# Altium PCB D_FEE PID.PcbDoc
Units mm, origin at the board's own origin, x right, y up, seen from the top; angles counter-clockwise.
Board outline 74.57 x 41.05 mm, 2 copper layers (Top Layer, Bottom Layer), stack 1.58 mm thick; 117 components, 79 nets, 453 pads, 0 vias.
Unrouted connection lines stored in the file: 259.
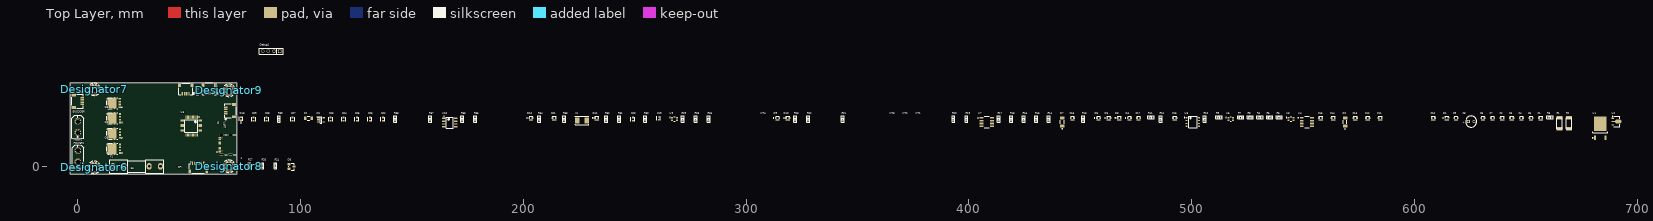
[diagram p0: Top Layer view]
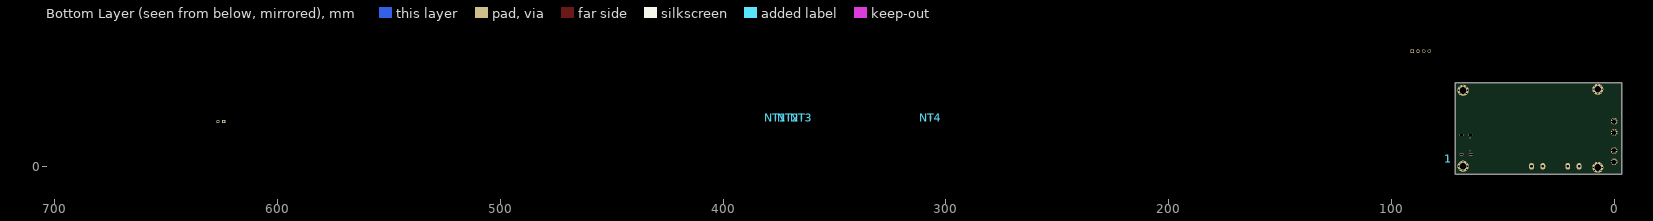
[diagram p1: Bottom Layer view, seen from below]

## Layer stack, top to bottom
Top Solder: solder mask 0.01, Solder Resist, Dk 3.5
Top Layer: signal copper 0.035
Dielectric 1: dielectric 1.51, FR-4, Dk 4.8
Bottom Layer: signal copper 0.035
Bottom Solder: solder mask 0.01, Solder Resist, Dk 3.5

## Board outline
-3.353,-3.48 71.222,-3.48 71.222,37.567 -3.353,37.567

## Design rules (kind name [scope] priority, off if disabled: settings)
Clearance [All] p1: gap=0 ignorepadtopadclearanceinfootprint=FALSE
PolygonConnect [All] p1: connectstyle=Relief reliefconductorwidth=0.254 reliefentries=4 polygonreliefangle="90 Angle" airgapwidth=0.254
RoutingVias [All] p1: holewidth=0.2 width=0.5 viastyle="Through Hole" minholewidth=0.2 minwidth=0.5 maxholewidth=0.2 maxwidth=0.5
SolderMaskExpansion [All] p1: expansion=0.102 istentingtop=FALSE
Width [All] p1: maxlimit=2 minlimit=0.1 preferedwidth=0.3 minimp=50.000000 maximp=50.000000 favimp=50.000000
30 further rules are at their usual default settings.

## Components (designator, comment, footprint, x,y, rotation, side; value= is the part's Value field where it differs from the comment)
1 "Node_B" Node_B 74.346,3.404 r90 top
C1 "1uF" FP-CC0603-DA-MFG 656.666,21.692 r0 top value="10 nF"
C2 "1uF" FP-CC0603-DA-MFG 639.394,21.692 r0 top value="10 nF"
C3 "1uF" FP-CC0603-DA-MFG 643.712,21.692 r0 top value="10 nF"
C4 "100nF" FP-CC0603-DA-MFG 648.03,21.692 r0 top value="10 nF"
C5 "10uF" FP-CC0603-DA-MFG 652.348,21.692 r0 top value="10 nF"
C6 "1uF" FP-CC0603-DA-MFG 630.758,21.692 r0 top value="10 nF"
C7 "10uF" FP-CC0603-DA-MFG 635.076,21.692 r0 top value="10 nF"
C8 "470uF/50V" CA-ALU-5L 625.475,20.092 r0 top value=104
C9 "10uF" FP-CC0603-DA-MFG 618.668,21.692 r0 top value="10 nF"
C10 "100nF" FP-CC0603-DA-MFG 608.482,21.692 r0 top value="10 nF"
C11 "1uF" FP-CC0603-DA-MFG 584.606,21.692 r0 top value="10 nF"
C12 "10uF" FP-CC0603-DA-MFG 579.018,21.692 r0 top value="10 nF"
C13 "1uF" FP-CC0603-DA-MFG 573.43,21.692 r0 top value="10 nF"
C14 "100nF" FP-CC0603-DA-MFG 563.499,21.692 r0 top value="10 nF"
C15 "100nF" FP-CC0603-DA-MFG 557.911,21.692 r0 top value="10 nF"
C16 "1uF" FP-CC0603-DA-MFG 492.43,21.692 r0 top value="10 nF"
C17 "10uF" FP-CC0603-DA-MFG 476.148,21.692 r0 top value="10 nF"
C18 "1uF" FP-CC0603-DA-MFG 446.481,21.692 r0 top value="10 nF"
C19 "100nF" FP-CL10-0_1-MFG 260.756,21.565 r90 top
C20 "10pF" FP-CC0603-DA-MFG 249.123,21.184 r90 top value="10 nF"
C21 "10pF" FP-CC0603-DA-MFG 213.792,21.692 r0 top value="10 nF"
C22 "22nF" FP-CC0603-DA-MFG 136.881,21.184 r90 top value="10 nF"
C23 "100nF" FP-CC0603-DA-MFG 113.513,21.184 r90 top value="10 nF"
C24 "100nF" FP-CC0603-DA-MFG 119.355,21.184 r90 top value="10 nF"
C25 "100nF" FP-CC0603-DA-MFG 125.197,21.184 r90 top value="10 nF"
C26 "100nF" FP-CC0603-DA-MFG 131.039,21.184 r90 top value="10 nF"
C27 "100nF" FP-CC0603-DA-MFG 96.418,21.184 r90 top value="10 nF"
C28 "1uF" FP-CC0603-DA-MFG 84.734,21.184 r90 top value="10 nF"
C29 "1uF" FP-CC0603-DA-MFG 78.892,21.184 r90 top value="10 nF"
CAN "JST SR 4PIN" "JST SR 4PIN" 58.987,34.814 r0 top
D1 "LTST-C191KRKT" FP-LTST-C191KRKT-MFG 614.578,21.768 r0 top
D2 "1N4148" FP-DO-213AA-MFG 568.858,19.914 r90 top
D3 "LTST-C191TBKT" FP-LTST-C191TBKT-MFG 467.436,21.743 r0 top
D4 "LTST-C191TBKT" FP-LTST-C191TBKT-MFG 472.059,21.743 r0 top
D5 "LTST-C191TBKT" FP-LTST-C191TBKT-MFG 458.216,21.743 r0 top
D6 "LTST-C191TBKT" FP-LTST-C191TBKT-MFG 462.813,21.743 r0 top
D7 "1N4148" FP-DO-213AA-MFG 441.909,19.914 r90 top
D8 "PGB102ST23WR" FP-PGB1-ST23-MFG 95.885,-0.127 r0 top value=0.12pF
D9 "LTST-C191TBKT" FP-LTST-C191TBKT-MFG 314.071,21.743 r0 top
D10 "LTST-C191TBKT" FP-LTST-C191TBKT-MFG 318.694,21.743 r0 top
D11 "LTST-C191TBKT" FP-LTST-C191TBKT-MFG 232.893,21.743 r0 top
D12 "LTST-C191TBKT" FP-LTST-C191TBKT-MFG 203.403,21.743 r0 top
D13 "LTST-C191KRKT" FP-LTST-C191KRKT-MFG 73.228,21.285 r90 top
Debug1 "JP4" JP4-C1T 90.576,51.664 r180 top
Designator6 "Comment" PAD_2.0 7.341,-0.457 r0 top
Designator7 "Comment" PAD_2.0 7.341,34.595 r0 top
Designator8 "Comment" PAD_2.0 67.793,0.025 r0 top
Designator9 "Comment" PAD_2.0 67.804,34.123 r0 top
ENCODER "JST SR 4PIN" "JST SR 4PIN" -0.117,29.278 r90 top
F1 "F1A" Fuse1 26.416,0 r0 top value=Fuse
F2 "FUSE 1206" FP-MF-NSMF110-2-MFG 103.53,21.539 r0 top value=0.06-0.2Ω
IC1 "RT9193-33GB" SOT94P279X130-5N 109.144,20.828 r0 top
J6 "USB4105-GF-A" GCT_USB4105-GF-A 68.529,9.728 r90 top
Motor1 "XT30UPB-M" XT30UPB-M -0.043,17.722 r90 top
NT1 "Node_B" Node_B 376.225,21.844 r90 top
NT2 "Node_B" Node_B 370.383,21.844 r90 top
NT3 "Node_B" Node_B 364.541,21.844 r90 top
NT4 "Node_B" Node_B 306.553,21.844 r90 top
POWER1 "XT30UPB-M" XT30UPB-M 0.007,4.537 r90 top
PULSE "JST SR 4PIN" "JST SR 4PIN" 48.384,34.764 r0 top
Q1 "NTMFS3D5N08XT1G" NTMFS5C460NLT1G 18.874,5.945 r90 top
Q2 "NTMFS3D5N08XT1G" NTMFS5C460NLT1G 18.874,12.795 r90 top
Q3 "NTMFS3D5N08XT1G" NTMFS5C460NLT1G 18.874,19.644 r90 top
Q4 "NTMFS3D5N08XT1G" NTMFS5C460NLT1G 18.86,26.494 r90 top
R1 "4R7" RES-SMD-2010 665.302,19.304 r90 top
R2 "4R7" RES-SMD-2010 669.493,19.304 r90 top
R3 "330" RES-SMD-0603 660.832,21.971 r0 top
R4 "5.1K" RES-SMD-0603 530.682,21.971 r0 top
R5 "5.1K" RES-SMD-0603 535,21.971 r0 top
R6 "4R7" RES-SMD-0603 539.344,21.971 r0 top
R7 "5.1K" RES-SMD-0603 522.021,21.971 r0 top
R8 "5.1K" RES-SMD-0603 526.339,21.971 r0 top
R9 "4R7" RES-SMD-0603 512.318,21.971 r0 top
R10 "5.1K" RES-SMD-0603 505.943,21.209 r90 top
R11 "5.1K" RES-SMD-0603 481.711,21.971 r0 top
R12 "5.1K" RES-SMD-0603 486.054,21.209 r90 top
R13 "330R" RES-SMD-0603 451.282,21.209 r90 top
R14 "330R" RES-SMD-0603 435.788,21.209 r90 top
R15 "5.1K" RES-SMD-0603 424.586,21.209 r90 top
R16 "5.1K" RES-SMD-0603 430.174,21.209 r90 top
R17 "5.1K" RES-SMD-0603 413.385,21.209 r90 top
R18 "5.1K" RES-SMD-0603 418.973,21.209 r90 top
R19 "4R7" RES-SMD-0603 398.907,21.209 r90 top
R20 "4R7" RES-SMD-0603 393.065,21.209 r90 top
R21 "330R" RES-SMD-0603 343.357,21.209 r90 top
R22 "330R" RES-SMD-0603 327.863,21.209 r90 top
R23 "5.1K" RES-SMD-0603 321.996,21.209 r90 top
R24 "5.1K" RES-SMD-0603 88.722,0.229 r90 top
R25 "220K" RES-SMD-0603 283.235,21.209 r90 top
R26 "27R" RES-SMD-0603 82.88,0.229 r90 top
R27 "27R" RES-SMD-0603 77.013,0.229 r90 top
R28 "220K" RES-SMD-0603 277.368,21.209 r90 top
R29 "5.1K" RES-SMD-0603 271.526,21.209 r90 top
R30 "4R7" RES-SMD-0603 254.711,21.209 r90 top
R31 "5.1K" RES-SMD-0603 243.002,21.209 r90 top
R32 "5.1K" RES-SMD-0603 237.16,21.209 r90 top
R33 "4R7" RES-SMD-0603 218.364,21.209 r90 top
R34 "1.5K" RES-SMD-0603 207.162,21.209 r90 top
R35 "220K" RES-SMD-0603 178.384,21.209 r90 top
R36 "220K" RES-SMD-0603 172.542,21.209 r90 top
R37 "120R" RES-SMD-0603 158.217,21.209 r90 top
R38 "1K" RES-SMD-0603 142.443,21.209 r90 top
R39 "330R" RES-SMD-0603 90.322,21.209 r90 top
SPI "JST SR 6PIN" "JST SR 6PIN" 53.984,1.462 r0 top
U1 "L78M15CDT-TR" TO-252_N 683.412,17.069 r90 top
U2 "L78L05ABUTR" SOT-89_L 690.702,20.092 r0 top
U3 "SN74LVC2G14DCKR" FP-DCK0006A-MFG 544.576,21.209 r0 top
U4 "IR2184SPBF" FP-PG-DSO-8-MFG 551.764,19.863 r0 top
U5 "SN74LVC2G14DCKR" FP-DCK0006A-MFG 517.55,21.209 r0 top
U6 "HCPL-0631-500E" FP-HCPL-0631-500E-IPC_C 500.558,19.914 r0 top
U7 "IR2184SPBF" FP-PG-DSO-8-MFG 408,19.863 r0 top
U8 "STM32F103C8T6" STM-LQFP48_L 50.934,18.073 r270 top
U9 "SN74LVC2G17DCKR" FP-DCK0006A-MFG 267.818,21.209 r0 top
U10 "MCP2551-I/SN" MCHP-SN8_V 166.98,19.634 r0 top
UART "JST SR 4PIN" "JST SR 4PIN" 68.443,25.027 r270 top
X1 "8Mhz" FP-ABM7-MFG 226.314,20.6 r0 top

## Footprints (in the part's own frame and the unit in brackets; to place one, negate y for a bottom-side part, rotate by r counter-clockwise, add the part's x,y. Pads: shape width x height; smd on the part's side, far side on the other; paste and mask are expansions set on the pad)
CA-ALU-5L [mm] "Polarized capacitors, Aluminum Electrolytic Capacitors, 2-Leads, Body 5x11x2x0.5"
  rect 1.5x1.5 hole 0.8: 1(-1.27,0)
  round 1.5 hole 0.8: 2(1.27,0)
  silkscreen extent -2.5,-2.5 2.5,2.5, body extent -2.54,-2.54 2.54,2.54, height 13.9
FP-ABM7-MFG [mm]
  rect 1.9x2.6 smd paste+0 mask+0: 1(-2.15,0) 2(2.15,0)
  silkscreen extent -3.1,-1.85 3.1,1.85, body extent -3.2,-1.95 3.2,1.95, height 0.25
FP-CC0603-DA-MFG [mm]
  rect 0.8x0.9 smd paste+0 mask+0: 1(-0.75,0) 2(0.75,0)
  silkscreen extent -0.85,-0.85 0.85,0.85, body extent -1.35,-0.75 1.35,0.75, height 0.25
FP-CL10-0_1-MFG [mm]
  rect 0.625x0.825 smd paste+0 mask+0: 1(-0.575,0) 2(0.575,0)
  silkscreen extent -0.8,-0.79 0.8,0.79, body extent -0.99,-0.55 0.99,0.55, height 0.25
FP-DCK0006A-MFG [mm]
  rect 0.9x0.4 smd paste-1000 mask+0: 1(-1.1,0.65) 2(-1.1,0) 3(-1.1,-0.65) 4(1.1,-0.65) 5(1.1,0) 6(1.1,0.65)
  silkscreen extent -2.22,-1.07 0.27,1.07, body extent -1.65,-1.33 1.65,1.33, height 0.25
FP-DO-213AA-MFG [mm]
  rect 1.4x2.03 smd paste+0 mask+0: 1(-1.84,0) 2(1.84,0)
  silkscreen extent -3.2,-0.85 0.76,0.85, body extent -2.64,-1.11 2.64,1.11, height 0.25
FP-HCPL-0631-500E-IPC_C [mm]
  rect 0.914x0.518 smd paste+0 mask+0: 1(-2.795,1.905)
  rrect100% 0.914x0.518 smd paste+0 mask+0: 2(-2.795,0.635) 3(-2.795,-0.635) 4(-2.795,-1.905) 5(2.795,-1.905) 6(2.795,-0.635) 7(2.795,0.635) 8(2.795,1.905)
  silkscreen extent -3.88,-2.54 1.84,2.54, body extent -3.35,-2.64 3.35,2.64, height 0.25
FP-LTST-C191KRKT-MFG [mm]
  rect 0.8x0.8 smd paste+0 mask+0: 1(-0.75,0) 2(0.75,0)
  silkscreen extent -1.86,-0.78 0.86,0.78, body extent -1.25,-0.55 1.25,0.55, height 0.25
FP-LTST-C191TBKT-MFG [mm]
  rect 0.8x0.8 smd paste+0 mask+0: 1(-0.75,0) 2(0.75,0)
  silkscreen extent -1.87,-0.8 0.85,0.8, body extent -1.25,-0.55 1.25,0.55, height 0.25
FP-MF-NSMF110-2-MFG [mm]
  rect 1x1.6 smd paste+0 mask+0: 1(-1.5,0) 2(1.5,0)
  silkscreen extent -0.63,-0.9 0.63,0.9, body extent -2.1,-1 2.1,1, height 0.25
FP-PG-DSO-8-MFG [mm]
  rect 1.78x0.72 smd paste+0 mask+0: 1(-2.34,1.905) 2(-2.34,0.635) 3(-2.34,-0.635) 4(-2.34,-1.905) 5(2.34,-1.905) 6(2.34,-0.635) 7(2.34,0.635) 8(2.34,1.905)
  silkscreen extent -4.05,-2.5 1.07,2.5, body extent -3.33,-2.68 3.33,2.68, height 0.25
FP-PGB1-ST23-MFG [mil]
  rect 50x40 smd paste+0 mask+0: 1(-45,40) 2(-45,-40) 3(45,0)
  silkscreen extent -48,-63 48,63, body extent -74,-67 74,67, height 10
Fuse1 [mm]
  oval 2.2x3 hole 1.2: 1(-10.684,0) 1(-5.604,0) 2(5.579,0) 2(10.659,0)
  silkscreen extent -12.12,-3.05 12.09,3.05, body extent -10.84,-2.95 10.87,2.95, height 9.75
GCT_USB4105-GF-A [mm]
  rect 0.6x1.15 smd mask+0.05: A1_B12(-3.2,4.755) A4_B9(-2.4,4.755) B1_A12(3.2,4.755) B4_A9(2.4,4.755)
  rect 0.3x1.15 smd mask+0.05: A5(-1.25,4.755) A6(-0.25,4.755) A7(0.25,4.755) A8(1.25,4.755) B5(1.75,4.755) B6(0.75,4.755) B7(-0.75,4.755) B8(-1.75,4.755)
  oval 1x2.1 hole 0.6 slot 1.7 at 90 deg: SH1(-4.32,4.18) SH2(4.32,4.18)
  oval 1x1.8 hole 0.6 slot 1.4 at 90 deg: SH3(-4.32,0) SH4(4.32,0)
  round 0.65 hole 0.65 unplated: ""(-2.89,3.68) ""(2.89,3.68)
  silkscreen extent -4.47,-2.6 4.47,6.1, body extent -4.47,-2.6 4.47,5.11, height 3.31
JP4-C1T [mm] "4 row, straight, gold plating"
  rect 1.52x1.52 hole 1.02: 1(0,0)
  round 1.52 hole 1.02: 2(2.54,0) 3(5.08,0) 4(7.62,0)
  silkscreen extent -1.52,-1.27 9.14,1.27, body extent -1.52,-1.25 9.14,1.25, height 8.51
"JST SR 4PIN" [mil] "CONN_SM04B-SRSS-TB_JST"
  rect 26x61 smd paste+0 mask+0: 1(59.06,-82.62) 2(19.68,-82.62) 3(-19.68,-82.62) 4(-59.06,-82.62)
  rect 51x75 smd paste-37.5 mask-37.5: 5(-110.24,69.94) 6(110.24,69.94)
  silkscreen extent -123,-102 163,102, body extent -118,-91 118,104, height 116
"JST SR 6PIN" [mm]
  rect 0.6x1.55 smd: 1(-2.5,0) 2(-1.5,0) 3(-0.5,0) 4(0.5,0) 5(1.5,0) 6(2.5,0)
  rect 1.2x1.8 smd: S1(-3.8,-3.875) S2(3.8,-3.875)
  silkscreen extent -4,-4.57 4,0.6, body extent -4,-4.63 4,0.32, height 2.95
MCHP-SN8_V [mm] "SOIC, 8-Leads, Body 4.9x3.9mm, Pitch 1.27mm"
  rect 1.55x0.6 smd: 1(-2.7,1.905) 2(-2.7,0.635) 3(-2.7,-0.635) 4(-2.7,-1.905) 5(2.7,-1.905) 6(2.7,-0.635) 7(2.7,0.635) 8(2.7,1.905)
  silkscreen extent -2.82,-2.45 1.53,2.88, body extent -3,-2.45 3,2.45, height 1.75
Node_B [mm]
  rect 1.454x0.3 smd far side mask+0.065: 1(0,0.102) 2(0,-0.508)
NTMFS5C460NLT1G [mm]
  rect 0.75x1 smd: 1(0,0.021) 2(1.27,0.021) 3(2.54,0.021) 4(3.81,0.021)
  rect 0.75x0.475 smd: 5(3.81,5.779) 6(0,5.779)
  rect 4.56x2.73 smd: 7(1.905,4.179)
  rect 5.55x0.91 smd: 8(1.905,2.364)
  rect 4.56x0.43 smd: 9(1.905,1.699)
  silkscreen extent -0.55,-1 4.36,5.85, body extent -0.68,-0.28 4.47,5.87, height 1.01
PAD_2.0 [mm]
  round 0.5 hole 0.5: ""(-2.032,0) ""(-1.437,-1.437) ""(-1.437,1.437) ""(0,-2.032) ""(0,2.032) ""(1.437,-1.437) ""(1.437,1.437) ""(2.032,0)
  round 5 hole 3.1: ""(0,0)
  silkscreen extent -2.81,-2.81 2.81,2.81
RES-SMD-0603 [mm]
  rect 0.6x0.9 smd: 1(-0.889,0) 2(0.927,0)
  silkscreen extent -1.4,-0.64 1.4,0.64, body extent -0.8,-0.4 0.8,0.4, height 0.43
RES-SMD-2010 [mm] "Chip Capacitor, Body 3.2x2.5mm, IPC Medium Density"
  rect 1.5x2.7 smd: 1(-2.5,0.127) 2(2.5,0.127)
  silkscreen extent -2.54,-1.14 2.5,1.38, body extent -2.5,-1.12 2.5,1.38, height 0.6
SOT94P279X130-5N [mm]
  rect 1.25x0.65 smd: 1(-1.25,0.94) 2(-1.25,0) 3(-1.25,-0.94) 4(1.25,-0.94) 5(1.25,0.94)
  silkscreen extent -1.88,-1.45 0.28,1.51, body extent -1.4,-1.45 1.4,1.45, height 1.3
SOT-89_L [mm] "SOT89, 3-Leads, Body 4.5x2.4 mm, Pitch 1.5mm, Lead Span 4.1mm, IPC High Density"
  rect 1.2x0.5 smd: 1(-1.7,1.5) 3(-1.7,-1.5)
  rect 1.6x0.5 smd: 2(-1.5,0)
  oct 3x1.8 smd: 2(0.8,0)
  silkscreen extent -1.97,-2.3 1.4,2.42, body extent -1.2,-2.3 1.4,2.3, height 1.6
STM-LQFP48_L [mm] "QFP, 48-Leads, Body 7x7mm, Pitch 0.5mm, IPC High Density"
  oval 1.55x0.25 smd: 1(-4.025,2.75) 2(-4.025,2.25) 3(-4.025,1.75) 4(-4.025,1.25) 5(-4.025,0.75) 6(-4.025,0.25) 7(-4.025,-0.25) 8(-4.025,-0.75) 9(-4.025,-1.25) 10(-4.025,-1.75) 11(-4.025,-2.25) 12(-4.025,-2.75) 25(4.025,-2.75) 26(4.025,-2.25) 27(4.025,-1.75) 28(4.025,-1.25) 29(4.025,-0.75) 30(4.025,-0.25) 31(4.025,0.25) 32(4.025,0.75) 33(4.025,1.25) 34(4.025,1.75) 35(4.025,2.25) 36(4.025,2.75)
  oval 0.25x1.55 smd: 13(-2.75,-4.025) 14(-2.25,-4.025) 15(-1.75,-4.025) 16(-1.25,-4.025) 17(-0.75,-4.025) 18(-0.25,-4.025) 19(0.25,-4.025) 20(0.75,-4.025) 21(1.25,-4.025) 22(1.75,-4.025) 23(2.25,-4.025) 24(2.75,-4.025) 37(2.75,4.025) 38(2.25,4.025) 39(1.75,4.025) 40(1.25,4.025) 41(0.75,4.025) 42(0.25,4.025) 43(-0.25,4.025) 44(-0.75,4.025) 45(-1.25,4.025) 46(-1.75,4.025) 47(-2.25,4.025) 48(-2.75,4.025)
  silkscreen extent -4.15,-2.85 2.85,3.55, body extent -3.5,-3.5 3.5,3.5, height 1.6
TO-252_N [mm] "D-PAK, 4-Leads, Body 6.1x6.5mm, Pitch 2.28mm, Lead Span 9.7mm, IPC Medium Density"
  rect 2.1x0.95 smd: 1(-4.25,2.28) 3(-4.25,-2.28)
  rect 6.5x5.5 smd: 4(2.05,0)
  silkscreen extent -4.37,-3.3 -1.6,3.43, body extent -2,-3.3 4.2,3.3, height 2.4
XT30UPB-M [mil]
  round 118.11 hole 70.87: P$1(-98.43,0) P$2(98.43,0)
  round 10 hole 10: ""(-144.68,0) ""(-131.14,-32.71) ""(-131.14,32.71) ""(-98.43,-46.26) ""(-98.43,46.26) ""(-65.71,-32.71) ""(-65.71,32.71) ""(-52.17,0) ""(52.17,0.98) ""(65.02,-32.01) ""(66.41,33.41) ""(97.44,-46.26) ""(99.41,46.26) ""(130.44,-33.41) ""(131.83,32.01) ""(144.69,-0.98)
  silkscreen extent -201,-102 201,102, body extent -201,-102 201,102, height 421

## Part data
1 NT1 NT2 NT3 NT4: "Node"
C1 C2 C3 C4 C5 C6 C7 C9 C10 C11 C12 C13 C14 C15 C16 C17 C18 C20 C21 C22 C23 C24 C25 C26 C27 C28 C29: library part CMP-2100-03600-2, "CAP CER 10000PF 50V X7R 0603", Capacitance="10 nF", Manufacturer=YAGEO, Manufacturer Part Number=CC0603KRX7R9BB103, Package=CC0603-DA, Temperature="-55°C to +125°C", Temperature Characteristic=X7R, Temperature Coefficient=15%, Temperature Range High=+125°C, Temperature Range Low=-55°C, Tolerance=0.1, Voltage="50 V", Automotive=No, Category=Cap, ComponentLink2Description=Datasheet, ComponentLink2URL=http://www.yageo.com/documents/recent/UPY-GPHC_X7R_6.3V-to-50V_18.pdf, Device Class L1="Passive Components", Device Class L2=Capacitors, Device Class L3="Ceramic Capacitors", Digikey Description="CAP CER 10000PF 50V X7R 0603", Footprint Url=http://www.yageo.com/exep/pages/download/literatures/UPY-C_GEN_24.pdf, Height=0.9mm, Lead Free=Yes, Material=Ceramic, Mouser Description="Multilayer Ceramic Capacitor, CC Series, 0.01 - F, - 10%, X7R, 50 V, 0603 [1608 Metric]", Octopart=https://octopart.com/cc0603krx7r9bb103-yageo-192938, RoHS=TRUE, Voltage Rating="50 V"
C8: library part CN-ALU-DIP, "Capacitor (Semiconductor SIM Model)", LatestRevisionDate=17-Jul-2002, LatestRevisionNote="Re-released for DXP Platform.", PackageReference=C1206, Publisher="Altium Limited"
C19: library part CMP-13271-000011-1, "CAP CER 0.1UF 50V X7R 0603", Manufacturer="Samsung Electro-Mechanics America, Inc", Manufacturer Part Number=CL10B104JB8NNNC, Package=CL10-0.1, Temperature="-55°C to +125°C", Temperature Characteristic=X7R, Temperature Coefficient=15%, Temperature Range High=+125°C, Temperature Range Low=-55°C, Tolerance=5%, Voltage Rating=50V, Automotive=No, Capacitance=100nF, Category=Cap, ComponentLink2Description=Datasheet, ComponentLink2URL=http://www.samsungsem.com/kr/support/product-search/mlcc/__icsFiles/afieldfile/2019/06/18/CL10B104JB8NNNC-19.pdf, Device Class L1="Passive Components", Device Class L2=Capacitors, Device Class L3="Ceramic Capacitors", Digikey Description="CAP CER 0.1UF 50V X7R 0603", Height=0.9mm, Ipc Land Pattern Name=CAPC16080X80, Lead Free=Yes, Material=Ceramic, Octopart=https://octopart.com/cl10b104jb8nnnc-samsung-9302151, RoHS=TRUE
CAN ENCODER PULSE UART: "SM04B-SRSS-TB", Mfr_Name=JST, RefDes=RefDes, Type=Type
D1 D13: library part CMP-2000-05199-2, Case Code (Imperial)=0603, Case Code (Metric)=1608, Color=Red, Current=2A, Forward Current=20mA, Forward Voltage=2V, Lens Color=Colorless, Max Operating Temperature=85°C, Min Operating Temperature=-55°C, Power Dissipation=75mW, Reverse Voltage=5V, Case/Package=0603, Depth=800µm, Dominant Wavelength=631nm, Height=550µm, Illumination Color=Red, Lead Free="Lead Free", Length=1.6mm, Lens Style=Clear, Lens Transparency=Clear, Luminous Intensity=54mcd, Mount="Surface Mount", NexarPartId=549908, Number of Elements=1, Number of LEDs=1, Number of Pins=2, Packaging="Tape and Reel", Power Rating=75mW, Radiation Hardening=No, RoHS=Compliant, Schedule B="8541402000, 8541402000", Test Current=20mA, Viewing Angle=130°, Voltage=2V, Wavelength=639nm, Width=800µm
D2 D7: library part CMP-06359-000012-1, "DIODE GEN PURP 75V 200MA DO213AA"
D3 D4 D5 D6 D9 D10 D11 D12: library part CMP-22017-000008-1, "LED BLUE CLEAR CHIP SMD", Case Code (Imperial)=0603, Case Code (Metric)=1608, Color=Blue, Forward Current=20mA, Forward Voltage=3.8V, Lens Color=Colorless, Max Operating Temperature=80°C, Max Power Dissipation=75mW, Min Operating Temperature=-20°C, Package Quantity=1, Power Dissipation=76mW, Reverse Voltage=5V, Case/Package=0603, Depth=1.6mm, Dominant Wavelength=475nm, Height=0.55mm, Illumination Color=Blue, Lead Free="Lead Free", Length=0.8mm, Lens Style=Diffused, Lens Transparency=Clear, Luminous Intensity=180mcd, Mount="Surface Mount", Number of Elements=1, Number of LEDs=1, Number of Pins=2, Packaging="Tape and Reel", Radiation Hardening=No, Test Current=20mA, Viewing Angle=130°, Wavelength=468nm, Width=0.8mm
D8: library part CMP-08607-000007-1, "TVS DIODE 24V 150V SOT23-3", Capacitance=0.12pF, Clamping Voltage=150V, Manufacturer="Littelfuse Inc", Package=PGB1-ST23, Temperature="-65°C to +125°C", Temperature Range High=+125°C, Temperature Range Low=-65°C, Automotive=No, Category=Diode, ComponentLink2Description=Datasheet, ComponentLink2URL=https://www.littelfuse.com/~/media/electronics/datasheets/pulseguard_esd_suppressors/littelfuse_pulseguard_pgb1_datasheet.pdf.pdf, Device Class L1="Circuit Protection", Device Class L2="TVS Diodes", Device Class L3=unset, Digikey Description="TVS DIODE 24V 150V SOT23-3", Direction=Bidirectional, Height=0.79mm, Lead Free=Yes, Manufacturer Part Number=PGB102ST23WR, Mouser Description="ESD Suppressors PulseGuard ESD SOT23 24VDC PGB102ST23WR", Number of Channels=2, Octopart=https://octopart.com/pgb102st23wr-littelfuse-347719, RoHS=TRUE
Debug1: "WR-PHD 2.54 mm Angled Socket Header", Manufacturer="W¨¹rth Elektronik eiSos GmbH", partNo=613004143121, ComponentLink1 Description=Manufacturer, ComponentLink1URL=http://www.we-online.com, ComponentLink2 Description=Datasheet, ComponentLink2URL=http://katalog.we-online.de/em/datasheet/6130xx143121.pdf, Created by="Karrer Zheng", Created Date="29 March 2013", NoPins=04
F1: library part Fuse, "Fuse", Designed by=VanDungEvn
F2: library part CMP-07400-000012-1, "PTC RESET FUSE 6V 1.1A 1206", Ambient Temperature Range High=+85°C, Ambient Temperature Range Low=-40°C, Current Rating=100A, Hold Current=1.1A, Manufacturer=Bourns, Manufacturer Part Number=MF-NSMF110-2, Resistance=0.06-0.2Ω, Temperature="-40°C to +85°C", Trip Current=2.2A, Voltage Rating=6V, Automotive=Yes, Automotive Grade="Grade 3", Category=Fuse, ComponentLink2Description=Datasheet, ComponentLink2URL=https://www.bourns.com/docs/Product-Datasheets/mfnsmf.pdf, Device Class L1="Circuit Protection", Device Class L2="PTC Resettable Fuses", Device Class L3=unset, Digikey Description="PTC RESET FUSE 6V 1.1A 1206", Height=0.7mm, Lead Free=Yes, Mouser Description="Resettable Fuses - PPTC 1.1A 6V 0.06ohm", Octopart=https://octopart.com/mf-nsmf110-2-bourns-41795, Package=MF-NSMF110-2, RoHS=TRUE, Temperature Range High=+85°C, Temperature Range Low=-40°C, Trip Time=0.1s
IC1: "Integrated Circuit", Manufacturer_Name=RICHTEK, Mouser Part Number=835-RT9193-33GB, Datasheet Link=http://www.richtek.com/assets/product_file/RT9193/DS9193-17.pdf, Height=1.295mm, Manufacturer_Part_Number=RT9193-33GB, Mouser Price/Stock=https://www.mouser.co.uk/ProductDetail/Richtek/RT9193-33GB?qs=amGC7iS6iy8ybRcZ9Wn2ww%3D%3D
J6: Package=None, Availability=Unavailable, MF="{'manufacturer': u'GCT'}", MP=USB4105-GF-A, Price=None
Motor1 POWER1: "Socket; DC supply; XT30; male; PIN: 2; on PCBs; THT; yellow; 15A; 500V", Package=None, Availability="Not in stock", Check_prices=https://www.snapeda.com/parts/XT30UPB-M/AMASS/view-part/?ref=eda, MF=amass, MP=XT30UPB-M, Price=None, SnapEDA_Link=https://www.snapeda.com/parts/XT30UPB-M/AMASS/view-part/?ref=snap
Q1 Q2 Q3 Q4: "MOSFET (N-Channel)", Manufacturer_Name=onsemi, Datasheet Link=https://www.onsemi.com/download/data-sheet/pdf/ntmfs3d5n08x-d.pdf, Height=1.1mm, Manufacturer_Part_Number=NTMFS3D5N08XT1G
R1 R2 R3 R4 R5 R6 R7 R8 R9 R10 R11 R12 R13 R14 R15 R16 R17 R18 R19 R20 R21 R22 R23 R24 R25 R26 R27 R28 R29 R30 R31 R32 R33 R34 R35 R36 R37 R38 R39: library part Res-SMD, "Resistor", Manufacturer="Generic Components", Class=Passive, Published=08/06/2000, Publisher="Altium Hobart Technology Centre"
SPI: "Connector Header Surface Mount, Right Angle 6 position 0.039 _1.00mm_SM06B-SRSS-TB(LF)(SN)", Package=None, Digi-Key_Part_Number=455-1806-1-ND, Digi-Key_Purchase_URL=https://www.digikey.com/product-detail/en/jst-sales-america-inc/SM06B-SRSS-TB_LF__SN_/455-1806-1-ND/926877?utm_source=snapeda&utm_medium=aggregator&utm_campaign=symbol, MF="JST Sales", MP=SM06B-SRSS-TB_LF__SN_, SnapEDA_Link=https://www.snapeda.com/parts/SM06B-SRSS-TB%28LF%29%28SN%29/JST%20Sales%20America%20Inc./view-part/554386/?ref=snap
U1: library part CMP-0244-00203-1, "Positive Voltage Regulator, 15V, 3-Pin DPAK, Tape and Reel", ComponentLink1Description="Manufacturer URL", ComponentLink1URL=http://www.st.com, ComponentLink2Description=Datasheet, ComponentLink2URL=http://www.st.com/internet/com/TECHNICAL_RESOURCES/TECHNICAL_LITERATURE/DATASHEET/CD00000447.pdf, DatasheetVersion=1/11/2010, PackageDescription="3-Pin Transistor Outline Package 2.28 mm Pitch, 9.7 mm Lead Span (DPAK)", PackageReference=TO-252, PackageVersion=2011
U2: library part CMP-0244-00406-1, "Positive Voltage Regulator, 5V, 4-Pin SOT-89, Tape and Reel", ComponentLink1Description="Manufacturer URL", ComponentLink1URL=http://www.st.com, ComponentLink2Description=Datasheet, ComponentLink2URL=http://www.st.com/internet/com/TECHNICAL_RESOURCES/TECHNICAL_LITERATURE/DATASHEET/CD00000446.pdf, DatasheetVersion=1/02/2011, PackageDescription="3-Pin SOT-89 Package 1.5 mm Pitch, 4.1 mm Lead Span", PackageReference=SOT-89, PackageVersion=2011
U3 U5: library part CMP-0859-00454-5, "IC INVERTER SCHMITT 2CH SC70-6", Case/Package=SC, High Level Output Current=-32mA, Low Level Output Current=32mA, Max Operating Temperature=125°C, Max Supply Voltage=5.5V, Min Operating Temperature=-40°C, Min Supply Voltage=1.65V, Package Quantity=3000, Quiescent Current=10uA, Contact Plating=Gold, Lead Free="Lead Free", Logic Function=Inverting, Max Output Current=32mA, Mount="Surface Mount", Number of Bits=2, Number of Circuits=2, Number of Elements=2, Number of Gates=2, Number of Inputs=1, Number of Pins=6, Output Current=32mA, Packaging="Tape and Reel", Propagation Delay=9.5ns, Radiation Hardening=No, REACH SVHC="No SVHC", RoHS Compliant=Yes, Termination=SMD/SMT, Turn-On Delay Time=9.5ns, Weight=8.8E-05oz
U4 U7: library part CMP-32851-000025-1, "IC GATE DRVR HALF-BRIDGE 8SOIC", Ambient Temperature Range High=+125°C, Ambient Temperature Range Low=-40°C, Manufacturer=Infineon, Max Junction Temp=+150°C, Max Power Dissipation=0.625W, Max Supply Voltage=20V, Min Supply Voltage=10V, Nominal Supply Current=60-1000uA, Package=PG-DSO-8, Temperature="to +150°C", Automotive=No, Category=IC, ComponentLink2Description=Datasheet, ComponentLink2URL=https://www.infineon.com/dgdl/ir2184.pdf?fileId=5546d462533600a4015355c955e616d4, Device Class L1="Integrated Circuits (ICs)", Device Class L2="Power Management ICs", Device Class L3="Gate Drivers", Digikey Description="IC GATE DRVR HALF-BRIDGE 8SOIC", Fall Time=20ns, Footprint Url=https://www.infineon.com/dgdl/Infineon-po-8leadsoic-P-v01_00-EN.pdf?fileId=5546d462580663ef0158068b4ad80177, Height=1.75mm, Ipc Land Pattern Name=SOIC127P600X155-8, Lead Free=Yes, Manufacturer Part Number=IR2184SPBF, Number Of Drivers=2, Number Of Outputs=1, Octopart=https://octopart.com/ir2184spbf-infineon-65872954, Rise Time=40ns, RoHS=TRUE, Standoff Height=0.1mm, Temperature Range High=+150°C, Turn Off Delay Time=270ns, Turn On Delay Time=680ns
U6: library part CMP-18400-000027-1, "OPTOISO 3.75KV 2CH OPEN COLL 8SO", Case/Package=SOIC, Forward Current=15mA, Forward Voltage=1.5V, Isolation Voltage=3.75kV, Max Collector Current=50mA, Max Operating Temperature=85°C, Max Output Voltage=7V, Max Power Dissipation=60mW, Min Operating Temperature=-40°C, Package Quantity=1, Reverse Breakdown Voltage=5V, Contact Plating=Tin, Data Rate=10Mbps, Direction=Unidirectional, Fall Time=10ns, Input Current=15mA, Input Type=DC, Isolation Voltage-Max=3.75kV, Lead Free="Lead Free", Mount="Surface Mount", Number of Channels=2, Number of Elements=2, Number of Pins=8, Output Current=50mA, Output Current per Channel=50mA, Output Voltage=7V, Packaging="Tape and Reel", Power Dissipation=60mW, Propagation Delay=75ns, Radiation Hardening=No, REACH SVHC="No SVHC", Reverse Voltage (DC)=5V, Rise Time=24ns, RoHS Compliant=Yes, Series=-, Turn-On Delay Time=75ns, Voltage=5V
U8: library part CMP-0237-00215-3, "ARM Cortex-M3 32-bit MCU, 64 KB Flash, 20 KB Internal RAM, 37 I/Os, 48-pin LQFP, -40 to 85 degC, Tray", I/Os (High Current)=37, Operating Frequency(F) (Processor speed) (MHz)=72, Supply Voltage(Vcc) min (V)=2, A/D Converter="2x12-bit (10 Channel)", ComponentLink1Description="Manufacturer URL", ComponentLink1URL=http://www.st.com/web/en/home.html, ComponentLink2Description=Datasheet, ComponentLink2URL=http://www.st.com/st-web-ui/static/active/en/resource/technical/document/datasheet/CD00161566.pdf, ComponentLink3Description="Package Specification", ComponentLink3URL=http://www.st.com/st-web-ui/static/active/en/resource/technical/document/datasheet/DM00058181.pdf, Core="ARM Cortex-M3", DatasheetVersion="Rev. 16", FLASH Size (Prog) (kB)=64, Internal RAM Size (kB)=20, Mounting Technology="Surface Mount", PackageDescription="48-Pin Low Profile Quad Flat Package, 7 x 7 mm Body, 0.5 mm Pitch", PackageReference=LQFP48, PackageVersion="Rev. 6, 06/2013", Packing=Tray, PartNumber=STM32F103C8T6
U9: library part CMP-0859-00517-5, "IC BUF NON-INVERT 5.5V SC70-6", Case/Package=SC, High Level Output Current=-32mA, Low Level Output Current=32mA, Max Operating Temperature=125°C, Max Supply Voltage=5.5V, Min Operating Temperature=-40°C, Min Supply Voltage=1.65V, Nominal Supply Current=250mA, Package Quantity=1, Quiescent Current=10uA, Contact Plating=Gold, Height=0.9mm, Lead Free="Lead Free", Length=2mm, Logic Function="Schmitt Trigger", Mount="Surface Mount", Number of Bits=2, Number of Bits per Element=1, Number of Channels=2, Number of Circuits=2, Number of Elements=2, Number of Gates=2, Number of Input Lines=2, Number of Inputs=2, Number of Output Lines=2, Number Of Outputs=2, Number of Pins=6, Packaging="Tape and Reel", Polarity=Non-Inverting, Propagation Delay=4.3ns, Radiation Hardening=No, REACH SVHC="No SVHC", RoHS Compliant=Yes, Schmitt Trigger Input=Yes, Termination=SMD/SMT, Turn-On Delay Time=9.3ns, Width=1.25mm
U10: library part CMP-0186-00138-3, "High-Speed CAN Transceiver, /  1 Mb/s, 4.5 to 5.5 V, 8-Pin SOIC (SN), Industrial Temperature, RoHS, Tube", Manufacturer=Microchip, ComponentLink1Description="Manufacturer URL", ComponentLink1URL=http://www.microchip.com/, ComponentLink2Description=Datasheet, ComponentLink2URL=http://ww1.microchip.com/downloads/en/DeviceDoc/21667f.pdf, ComponentLink3Description="Package Specification", ComponentLink3URL=http://www.microchip.com/stellent/groups/techpub_sg/documents/packagingspec/en012702.pdf, DatasheetVersion="Rev. F, 07/2010", Mounting Technology="Surface Mount", PackageDescription="8-Pin Small Outline Integrated Circuit, Body 4.9 x 3.9 mm, Pitch 1.27 mm", PackageReference=SN8, RoHSCompliant=true
X1: library part CMP-2000-05034-2, "Crystal 8MHz ±20ppm 18pF SMD-2 6mm x 3.5mm", Case/Package=CSMD, ESR (Equivalent Series Resistance)=100R, Frequency=8MHz, Frequency Stability=30ppm, Frequency Tolerance=20ppm, Load Capacitance=18pF, Max Operating Temperature=85°C, Min Operating Temperature=-40°C, Operating Frequency="8 MHz", Package Quantity=1000, Resistor Type=Ceramic, Series Resistance=80R, Depth=3.5mm, Height=0.055inch, Lead Free="Lead Free", Length=6mm, Mount="Surface Mount", Number of Pins=2, Packaging="Tape and Reel", Radiation Hardening=No, REACH SVHC=Yes, Series=ABM7, Termination=SMD/SMT, Tolerance=20ppm, Width=0.138inch

## Nets (pads, with @x,y where several pads share a name; then routed paths per layer and width w, separated by ;. In a path a pad name is that pad's centre, name@x,y a point inside that pad or via, vN(x,y) a via of type N, cw(c..) or ccw(c..) an arc to the next point about the centre after c; other vN are vias at no path point)
3V3: C23.2 C24.2 C25.2 C26.2 C29.2 IC1.5 R15.2 R16.2 R17.2 R18.2 R31.1 R34.1 R39.1 U6.1 U6.4 U8.9 U8.24 U8.36 U8.48
5V3: C14.2 C15.2 C19.2 C27.2 C28.2 F2.2 IC1.1 IC1.3 R4.1 R5.1 R7.1 R8.1 U3.5 U5.5 U9.5 U10.3
5VDC: C9.2 C10.2 C16.2 R3.1 R10.1 R11.1 R12.1 U2.1 U6.8
15V: C4.1 C5.2 D2.2 D7.2 R2.2 U1.3 U4.5 U7.5
24V: C8.1 F1.2 Q1.5 Q1.6 Q1.7 Q1.8 Q1.9 Q2.5 Q2.6 Q2.7 Q2.8 Q2.9 R1.2
CAN_H: 1.2 CAN.2 U10.7
CAN_L: CAN.1 R37.2 U10.6
CAN_RX: U8.45 U10.4
CAN_TX: U8.46 U10.1
DGND: C4.2 C5.1 C7.1 C8.2 C9.1 C10.1 C16.1 D1.1 POWER1.P$2 Q3.1 Q3.2 Q3.3 Q4.1 Q4.2 Q4.3 R35.1 R36.1 U1.4 U2.2 U4.3 U6.5 U7.3
DIR: D5.1 PULSE.1 R7.2 U3.3
DIRi: U3.4 U8.17
ENA: D3.1 ENCODER.2 R4.2 U5.3
ENAi: U5.6 U8.11
ENB: D4.1 ENCODER.1 R5.2 U5.1
ENBi: U5.4 U8.10
GND: C1.1 C2.1 C3.1 C6.1 C11.1 C14.1 C15.1 C19.1 C20.2 C21.2 C22.1 C23.1 C24.1 C25.1 C26.1 C27.1 C28.1 C29.1 CAN.4 D9.1 D10.1 D13.1 Debug1.1 ENCODER.4 IC1.2 J6.A1_B12 J6.B1_A12 J6.SH1 J6.SH2 J6.SH3 J6.SH4 NT1.2 NT2.2 NT3.2 NT4.2 PULSE.4 R23.1 R24.1 R29.1 R38.2 SPI.6 SPI.S1 SPI.S2 U3.2 U5.2 U8.8 U8.23 U8.35 U8.47 U9.2 U10.2 UART.4
HO+: Q1.4 R6.1 R25.2
HO-: Q2.4 R19.1 R28.2
LO+: C12.1 C13.1 Motor1.P$1 Q1.1 Q1.2 Q1.3 Q3.4 Q3.5 Q3.6 Q3.7 Q3.8 Q3.9 R9.1 R25.1 R32.2 R35.2 U4.6
LO-: Q4.4 R20.1 R36.2
MISO: SPI.3 U8.27
MOSI: SPI.4 U8.26
Net1_1: 1.1 R37.1
NetC7_2: C7.2 R1.1 U1.1
NetC20_1: C20.1 U8.5 X1.2
NetC21_1: C21.1 U8.6 X1.1
NetC22_2: C22.2 IC1.4
NetD1_2: D1.2 R3.2
NetD3_2: D3.2 R15.1
NetD4_2: D4.2 R16.1
NetD5_2: D5.2 R17.1
NetD6_2: D6.2 R18.1
NetD9_2: D9.2 R22.2
NetD10_2: D10.2 R21.2
NetD11_1: D11.1 D12.2 R32.1
NetD13_2: D13.2 R39.2
NetF1_1: F1.1 POWER1.P$1
NetJ6_A5: J6.A5 R24.2
NetJ6_B5: J6.B5 R23.2
NetNT1_1: NT1.1 U8.18
NetNT2_1: NT2.1 U8.19
NetNT3_1: NT3.1 U8.20
NetNT4_1: NT4.1 U8.21
NetR2_1: R2.1 U2.3
NetR6_2: R6.2 U4.7
NetR9_2: R9.2 U4.4
NetR10_2: R10.2 U4.2 U7.2
NetR11_2: R11.2 U4.1 U6.7
NetR12_2: R12.2 U6.6 U7.1
NetR13_1: R13.1 U6.2
NetR14_1: R14.1 U6.3
NetR19_2: R19.2 U7.7
NetR20_2: R20.2 U7.4
NetR21_1: R21.1 U8.40
NetR22_1: R22.1 U8.41
NetR29_2: R29.2 U8.44
NetR30_2: R30.2 U9.6
NetR31_2: R31.2 U8.7
NetR33_1: R33.1 U9.3
NetR38_1: R38.1 U10.8
NSS: SPI.1 U8.25
PWM: D6.1 PULSE.2 R8.2 U3.1
PWM+: R13.2 U8.29
PWM-: R14.2 U8.30
PWMi: U3.6 U8.16
RX: R33.2 UART.2
RXi: U8.43 U9.4
SCK: SPI.2 U8.28
SWCLK: Debug1.2 U8.37
SWDIO: Debug1.3 U8.34
TX: R30.1 UART.1
TXi: U8.42 U9.1
USB_DN: D8.1 J6.A7 J6.B7 R27.2 U8.32
USB_DP: D8.2 J6.A6 J6.B6 R34.2 U8.33
VB+: C12.2 C13.2 D2.1 U4.8
VB-: C17.2 C18.2 D7.1 U7.8
VBUS: C1.2 C2.2 C3.2 C6.2 C11.2 CAN.3 D8.3 Debug1.4 ENCODER.3 F2.1 J6.A4_B9 J6.B4_A9 PULSE.3 SPI.5 UART.3
VS-: C17.1 C18.1 D11.2 D12.1 Motor1.P$2 Q2.1 Q2.2 Q2.3 Q4.5 Q4.6 Q4.7 Q4.8 Q4.9 R28.1 U7.6
pads on no net: CAN.5 CAN.6 Designator6. Designator7. Designator8. Designator9. ENCODER.5 ENCODER.6 J6. J6.A8 J6.B8 Motor1. POWER1. PULSE.5 PULSE.6 R26.1 R26.2 R27.1 U8.1 U8.2 U8.3 U8.4 U8.12 U8.13 U8.14 U8.15 U8.22 U8.31 U8.38 U8.39 U10.5 UART.5 UART.6

## Text inside footprints (layer, text, board x,y; h text height)
C8: Top Overlay "+" at 621.65,19.355 h0.7
F1: Top Overlay "3A" at 23.673,-1.549 h0.7
J6: Top 3D Body "PCB EDGE" at 71.029,15.128 h0.41 r90